# Altium PCB MAIN.PcbDoc
Units mm, origin at the board's own origin, x right, y up, seen from the top; angles counter-clockwise.
Board outline 80 x 22 mm, 2 copper layers (Top Layer, Bottom Layer), stack 1.571 mm thick; 27 components, 23 nets, 106 pads, 13 vias.
Unrouted connection lines stored in the file: 2.
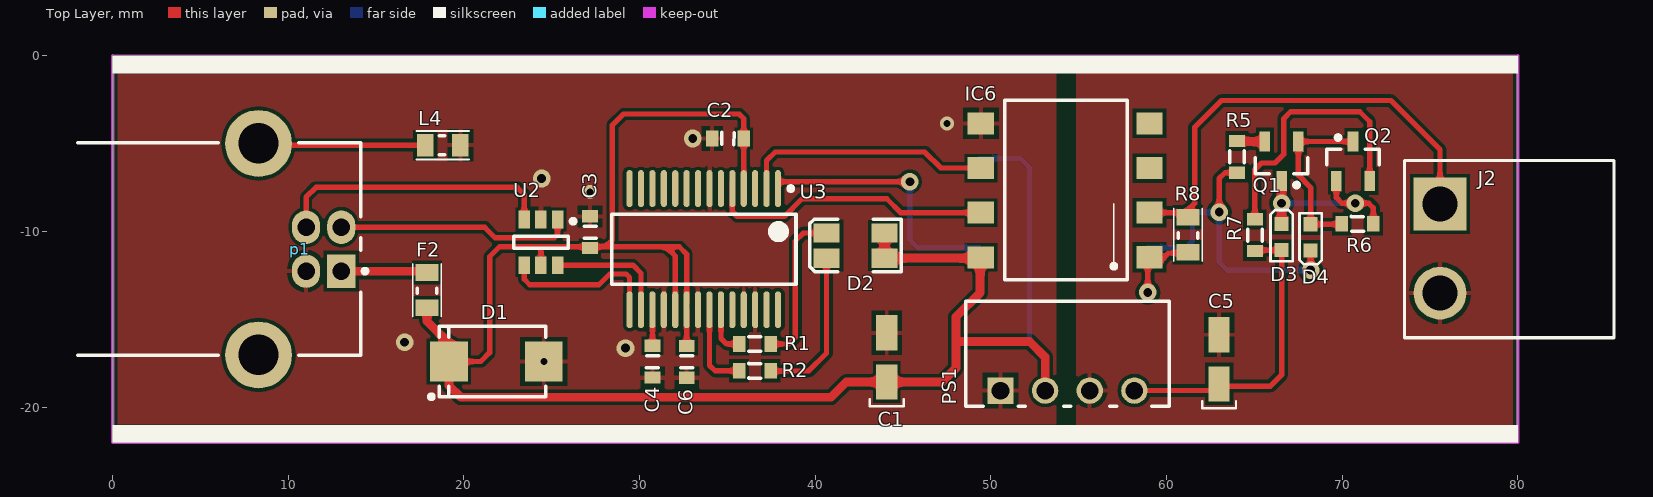
[diagram p0: Top Layer view]
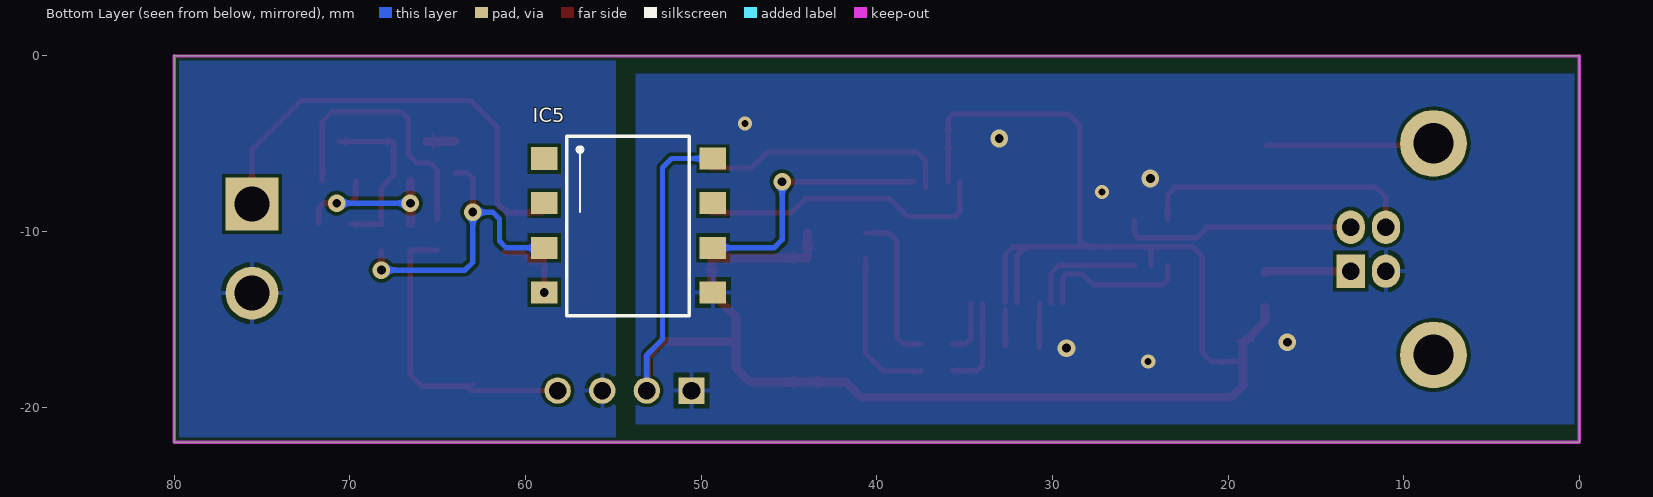
[diagram p1: Bottom Layer view, seen from below]

## Layer stack, top to bottom
Top Solder: solder mask 0.0102, Solder Resist, Dk 3.5
Top Layer: signal copper 0.0356
Dielectric 1: dielectric 1.5, FR-4, Dk 4.8
Bottom Layer: signal copper 0.0356
Bottom Solder: solder mask 0.0102, Solder Resist, Dk 3.5

## Board outline
0,-22 80,-22 80,0 0,0

## Design rules (kind name [scope] priority, off if disabled: settings)
Clearance [All] p1: gap=0.2 ignorepadtopadclearanceinfootprint=FALSE
PolygonConnect PolygonConnect_1 [(InNet('GND') OR InNet('GND1') OR InNet('GND2') OR InNet('GND3')) vs IsVia] p1: connectstyle=Direct reliefconductorwidth=0.254 reliefentries=4 polygonreliefangle="90 Angle" airgapwidth=0.254
PolygonConnect [All] p2: connectstyle=Relief reliefconductorwidth=0.254 reliefentries=4 polygonreliefangle="90 Angle" airgapwidth=0.254
RoutingVias [All] p1: holewidth=0.5 width=1 viastyle="Through Hole" minholewidth=0.5 minwidth=1 maxholewidth=5 maxwidth=1
SolderMaskExpansion [All] p1: expansion=0.102 istentingtop=FALSE
Width [All] p1: maxlimit=1 minlimit=0.2 preferedwidth=0.3
30 further rules are at their usual default settings.

## Classes and differential pairs
component class Main: C1 C5 C6 D3 D4 IC5 IC6 J2 PS1 Q1 Q2 R5 R6 R7 R8
component class USB: C2 C3 C4 D1 D2 F2 L4 p1 R1 R2 U2 U3

## Components (designator, comment, footprint, x,y, rotation, side; value= is the part's Value field where it differs from the comment)
C1 "10uF" CAP-TAN-A 44.069,-17.288 r270 top
C2 "100nF" c603 35.028,-4.699 r0 top
C3 "100nF" c603 27.178,-10.033 r270 top
C4 "100nF" c603 30.734,-17.399 r90 top
C5 "10uF" CAP-TAN-A 62.992,-17.399 r270 top
C6 "100nF" C603 32.678,-17.41 r90 top
D1 "SMBJ12A" DO-214AA 21.844,-17.399 r90 top
D2 "LED-RG" LED-1210 42.291,-10.795 r180 top
D3 "LED" LED-0603 66.548,-11.055 r90 top
D4 "LED" LED-0603 68.199,-9.579 r270 top
F2 "Fuse 1" PTC-0805 17.907,-13.335 r90 top
IC5 "HCPL-4100" SOP-8 54.128,-9.682 r180 bottom
IC6 "HCPL-4200" SOP-8 54.229,-7.62 r180 top
J2 "CONN-2" phonix-2 75.565,-13.502 r0 top
L4 "1K" r805 18.796,-5.08 r0 top
p1 "USB Connector" USB2-B-R -1.993,-11 r180 top
PS1 "B0524S-1WR2" B0524S1WR2 50.546,-19.05 r0 top
Q1 "BC846ALT1" SOT-23 66.548,-5.999 r270 top
Q2 "BC856ALT1" SOT-23 70.612,-5.999 r90 top
R1 "330" R0603 36.565,-16.399 r0 top
R2 "330" R0603 36.565,-17.923 r0 top
R5 "100" r0603 64.008,-5.745 r90 top
R6 "330K" r0603 70.866,-9.555 r180 top
R7 "100" r0603 65.024,-10.201 r270 top
R8 "470" R805 61.214,-10.176 r90 top
U2 "USBLC6-2" SOT-23-6 24.382,-10.608 r270 top
U3 "FT232RL" SSOP-28N 33.653,-11 r270 top

## Footprints (in the part's own frame and the unit in brackets; to place one, negate y for a bottom-side part, rotate by r counter-clockwise, add the part's x,y. Pads: shape width x height; smd on the part's side, far side on the other; paste and mask are expansions set on the pad)
B0524S1WR2 [mm]
  rect 1.5x1.5 hole 1: 1(0,0)
  round 1.5 hole 1: 2(2.54,0) 3(5.08,0) 4(7.62,0)
  silkscreen extent -1.99,-0.9 9.61,5.1, body extent -1.99,-0.9 9.61,5.1, height 10.26
c603 [mm]
  rect 0.7x0.9 smd: 1(-0.9,0) 2(0.9,0)
  silkscreen extent -0.35,-0.34 0.35,0.34, body extent -0.76,-0.38 0.76,0.38, height 0.6
C603 [mm]
  rect 0.7x0.9 smd: 1(-0.9,0) 2(0.9,0)
  silkscreen extent -0.35,-0.34 0.35,0.34, body extent -0.76,-0.38 0.76,0.38, height 0.6
CAP-TAN-A [mm] "Chip Capacitor, 2-Leads, Body 3.2x1.6mm, IPC High Density, chip Tantalum"
  rect 1.999x1.199 smd: 1(1.27,0) 2(-1.53,0)
  silkscreen extent 2.26,-0.97 2.65,0.97, body extent -1.94,-0.9 1.7,0.9, height 1.8
DO-214AA [mm]
  rect 2.26x2.16 smd: 1(0,-2.7) 2(0,2.7)
  silkscreen extent -2.12,-2.8 2,3.82, body extent -1.8,-2.7 1.8,2.7, height 2.3
LED-0603 [mm]
  rect 0.8x0.8 smd: 1(0,0) 2(1.5,0)
  silkscreen extent -0.64,-0.64 2.29,0.64, body extent -0.04,-0.41 1.56,0.38, height 0.7
LED-1210 [mm]
  rect 1.5x1.1 smd: 1(-1.651,0.713) 2(-1.651,-0.713) 3(1.651,-0.713) 4(1.651,0.713)
  silkscreen extent -2.6,-1.5 2.62,1.5, body extent -1.62,-1.36 1.62,1.34, height 1.1
phonix-2 [mm]
  rect 3x3 hole 2: 1(0,5.08)
  round 3 hole 2: 2(0,0)
  silkscreen extent -2.03,-2.54 9.91,7.54, body extent -2.1,-2.5 19.9,7.5, height 15.3
PTC-0805 [mm]
  rect 0.95x1.3 smd: 1(1.008,0.009) 2(-0.992,0.009)
  silkscreen extent -1.49,-0.8 1.51,0.82, body extent -1.07,-0.67 1.07,0.67, height 0.66
R0603 [mm]
  rect 0.7x0.9 smd: 1(-0.9,0) 2(0.9,0)
  silkscreen extent -0.34,-0.42 0.34,0.42, body extent -0.76,-0.38 0.76,0.38, height 0.45
r0603 [mm]
  rect 0.7x0.9 smd: 1(-0.9,0) 2(0.9,0)
  silkscreen extent -0.34,-0.42 0.34,0.42, body extent -0.76,-0.38 0.76,0.38, height 0.45
r805 [mm]
  rect 0.95x1.3 smd: 1(1,0) 2(-1,0)
  silkscreen extent -1.5,-0.81 1.5,0.81, body extent -1,-0.61 1,0.64, height 0.78
R805 [mm]
  rect 0.95x1.3 smd: 1(1,0) 2(-1,0)
  silkscreen extent -1.5,-0.81 1.5,0.81, body extent -1,-0.61 1,0.64, height 0.78
SOP-8 [mm]
  rect 1.5x1.3 smd: 1(-4.8,3.84)
  rect 1.5x1.25 smd: 2(-4.8,1.3) 3(-4.8,-1.24) 4(-4.8,-3.78) 5(4.8,-3.78) 6(4.8,-1.24) 7(4.8,1.3) 8(4.8,3.84)
  silkscreen extent -3.53,-5.1 3.45,5.11, body extent -4.97,-4.8 5.03,4.86, height 3.85
SOT-23 [mm]
  rect 1.15x0.6 smd: 1(-1.125,0.95) 2(-1.125,-0.95) 3(1.125,0)
  silkscreen extent -0.2,-1.5 1.47,1.5, body extent -1.13,-1.5 1.13,1.5, height 1.2
SOT-23-6 [mm]
  rect 1x0.65 smd: 1(-1.3,0.95) 2(-1.3,0) 3(-1.3,-0.95) 4(1.3,-0.95) 5(1.3,0) 6(1.3,0.95)
  silkscreen extent -1.32,-1.55 0.35,1.95, body extent -1.4,-1.45 1.4,1.45, height 1.45
SSOP-28N [mm]
  oval 2.1x0.35 smd: 1(-3.45,4.225) 2(-3.45,3.575) 3(-3.45,2.925) 4(-3.45,2.275) 5(-3.45,1.625) 6(-3.45,0.975) 7(-3.45,0.325) 8(-3.45,-0.325) 9(-3.45,-0.975) 10(-3.45,-1.625) 11(-3.45,-2.275) 12(-3.45,-2.925) 13(-3.45,-3.575) 14(-3.45,-4.225) 15(3.45,-4.225) 16(3.45,-3.575) 17(3.45,-2.925) 18(3.45,-2.275) 19(3.45,-1.625) 20(3.45,-0.975) 21(3.45,-0.325) 22(3.45,0.325) 23(3.45,0.975) 24(3.45,1.625) 25(3.45,2.275) 26(3.45,2.925) 27(3.45,3.575) 28(3.45,4.225)
  silkscreen extent -3.57,-5.25 2,5.25, body extent -3.73,-5.17 4.02,5.16, height 2.15
USB2-B-R [mm] "Connector; USB1.1, Type B, Thru-Hole; 4 Position; Right Angle"
  rect 1.6x1.9 hole 1: 1(-15.01,1.25)
  oval 1.6x1.9 hole 1: 2(-15.01,-1.25) 3(-13.01,-1.25) 4(-13.01,1.25)
  round 3.8 hole 2.3: 5(-10.3,6.02) 6(-10.3,-6.02)
  silkscreen extent -16.49,-6.05 -0.02,6.05, body extent -16.51,-7.45 -0.01,7.45, height 10.95

## Part data
C1 C5: library part CAP-POL, "Polar Capacitor", Voltage=10V
C2 C3 C4 C6: library part Cap, "Capacitor", Designer="Parsa Malekpour"
D1: library part SMBJxxA, "Surface Mount Transient Voltage Suppressors Diode"
D2: library part LED-RG-4
F2: "Fuse", LatestRevisionDate=17-Jul-2002, LatestRevisionNote="Re-released for DXP Platform.", PackageDescription="Thru-Hole; 2 Leads", PackageReference=PIN-W2/E2.8, Published=8-Jun-2000, Publisher="Altium Limited"
IC5: "<b>Isolation Amplifer</b><p> Source: http://www.avagotech.com/docs/AV02-0410EN", Package=None, Availability=Unavailable, MF="{'manufacturer': u'Broadcom Limited'}", MP=HCPL-4100, Price=None
IC6: "Optically Coupled 20 mA Current Loop Receiver", Package=None, Availability=Unavailable, MF="{'manufacturer': u'Broadcom Limited'}", MP=HCPL-4100, Price=None
L4: library part "Ferrite Bead", "FERRITE BEAD", Code_IEC=1005, Code_JEITA=0402, LatestRevisionDate=29-May-2009, LatestRevisionNote="IPC-7351 Footprint Added.", PackageDescription="Chip Inductor", Published=8-Jun-2000, Publisher="Altium Limited"
p1: library part USB2-B, "USB Connector-B Type", Adding Date=10/26/2010, Company="DASE Co", Designer="Eng. Saeid Jorablo"
PS1: "Power Supply", Manufacturer_Name="Mornsun Power", Datasheet Link=https://www.mornsun-power.com/public/uploads/pdf/B_D-1WR2.pdf, Height=10.16mm, Manufacturer_Part_Number=B0524S-1WR2
Q1: "General Purpose Transistor NPN Silicon", ComponentLink1Description="Manufacturer Link", ComponentLink1URL=http://www.onsemi.com/site/products/landing?taxonomyID=194, ComponentLink2Description=Datasheet, ComponentLink2URL=http://www.onsemi.com/pub/Collateral/BC846ALT1-D.PDF, DatasheetVersion=1997, LatestRevisionDate=17-Jul-2002, LatestRevisionNote="Re-released for DXP Platform.", PackageDescription="SOT-23; 3 Leads; Body 3.0 x 2.6 mm, inc. leads (LxW max)", PackageReference=318-08, PackageVersion=1997, Published=29-Sep-2000, Publisher="Altium Limited"
Q2: "General Purpose Transistor PNP Silicon", ComponentLink1Description="Manufacturer Link", ComponentLink1URL=http://www.onsemi.com/site/products/landing?taxonomyID=194, ComponentLink2Description=Datasheet, ComponentLink2URL=http://www.onsemi.com/pub/Collateral/BC856ALT1-D.PDF, DatasheetVersion=1997, LatestRevisionDate=17-Jul-2002, LatestRevisionNote="Re-released for DXP Platform.", PackageDescription="SOT-23; 3 Leads; Body 3.0 x 2.6 mm, inc. leads (LxW max)", PackageReference=318-08, PackageVersion=1997, Published=29-Sep-2000, Publisher="Altium Limited"
R1 R2 R5 R6 R7 R8: library part Resistor, "Resistor", Designer="Parsa Malekpour"
U2: "Very low capacitance ESD protection"

## Via types
v1: diameter 1, hole 0.5, Top Layer to Bottom Layer, tented both sides, 9 vias
v2: diameter 0.8, hole 0.4, Top Layer to Bottom Layer, tented both sides, 3 vias
v3: diameter 1, hole 0.5, Top Layer to Bottom Layer, 1 vias

## Nets (pads, with @x,y where several pads share a name; then routed paths per layer and width w, separated by ;. In a path a pad name is that pad's centre, name@x,y a point inside that pad or via, vN(x,y) a via of type N, cw(c..) or ccw(c..) an arc to the next point about the centre after c; other vN are vias at no path point)
+24V: C5.1 D3.1 PS1.4 R7.2 | length 17.7
  Top Layer w0.3: PS1.4@58.293,-19.05 63.119,-19.05 C5.1@63.373,-18.796 ; C5.1 63.119,-18.796 C5.1@63.373,-18.796 ; R7.2@65.024,-11.055 D3.1 66.548,-15.621 66.548,-18.161 65.913,-18.796 C5.1@63.373,-18.796
GND: C1.2 C2.1 C3.1 C4.1 C6.1 D1.1 IC5.5 IC6.5 L4.1 p1.4 PS1.1 U2.2 U3.7 U3.18 U3.21 U3.25 U3.26
  other v1: 29.195,-16.628 24.42,-6.976 33.02,-4.699
  other v2: 24.544,-17.399 27.178,-7.747 47.498,-3.84
  other v3: 16.622,-16.292
GND1: C5.2 J2.2 PS1.3
NetC4_2: C4.2 U3.17 | length 2.5
  Top Layer w0.3: U3.17@30.728,-14.058 U3.17 30.728,-16.557 C4.2@30.748,-16.577
NetD2_3: D2.3 R1.2 | length 9
  Top Layer w0.3: R1.2 38.487,-16.399 38.862,-16.024 38.862,-10.541 39.321,-10.082 D2.3
NetD2_4: D2.4 R2.2 | length 9
  Top Layer w0.3: R2.2 37.481,-17.94 39.624,-17.94 40.64,-16.924 D2.4
NetD3_2: D3.2 Q1.3 Q2.1 R6.1 | length 10.8
  Top Layer w0.3: Q2.1 69.662,-8.067 69.977,-8.382 v1(70.739,-8.382) 71.501,-8.382 71.766,-8.647 R6.1
  Top Layer w0.5: D3.2 v1(66.548,-8.382) Q1.3
  Bottom Layer w0.3: v1(66.548,-8.382) v1(70.739,-8.382)
NetD4_1: D4.1 Q1.1 Q2.3 R6.2 | length 9.9
  Top Layer w0.3: R6.2 69.942,-9.579 D4.1 68.199,-7.484 67.498,-6.783 Q1.1 Q2.3
NetD4_2: D4.2 IC5.3 R5.1 | length 18.1
  Top Layer w0.3: v1(62.992,-8.89) 62.992,-6.985 63.332,-6.645 R5.1 ; v1(68.199,-12.192) D4.2
  Bottom Layer w0.3: IC5.3 61.087,-10.922 61.468,-10.541 61.468,-9.277 61.849,-8.896 62.986,-8.896 v1(62.992,-8.89) 62.992,-11.742 63.442,-12.192 v1(68.199,-12.192)
NetF2_1: F2.1 p1.1 | length 4.9
  Top Layer w0.5: p1.1 17.821,-12.25 F2.1
NetIC5_4: IC5.4 IC6.1 R8.2 | length 4.6
  Top Layer w0.3: v1(58.928,-13.462) 58.928,-11.561 IC6.1 59.276,-11.707 59.629,-11.707 60.124,-11.213 61.177,-11.213 R8.2
NetIC5_6: IC5.6 U3.1 | length 14.9
  Top Layer w0.3: U3.1@37.878,-7.158 v1(45.385,-7.158)
  Bottom Layer w0.3: v1(45.385,-7.158) 45.385,-10.46 45.847,-10.922 IC5.6
NetIC6_2: IC6.2 J2.1 R8.1 | length 26
  Top Layer w0.3: IC6.2 61.057,-8.92 61.595,-8.382 61.595,-4.064 63.119,-2.54 72.771,-2.54 75.565,-5.334 J2.1
NetIC6_6: IC6.6 U3.2 | length 14.4
  Top Layer w0.3: U3.2 37.228,-5.952 37.719,-5.461 46.228,-5.461 47.147,-6.38 IC6.6
NetIC6_7: IC6.7 U3.5 | length 16.7
  Top Layer w0.3: U3.5@35.278,-7.158 U3.5 35.278,-8.862 35.549,-9.133 38.238,-9.133 39.243,-8.128 44.069,-8.128 44.861,-8.92 IC6.7
NetL4_2: L4.2 p1.5 p1.6 | length 8.1
  Top Layer w0.3: p1.6@9.775,-4.98 9.875,-5.08 L4.2
Netp1_2: p1.2 U2.1 U2.6 U3.16 | length 20.1
  Top Layer w0.3: p1.2 21.18,-9.75 21.784,-10.354 25.144,-10.354 25.332,-10.166 U2.1 ; U2.6 29.619,-11.908 30.078,-12.367 U3.16@30.078,-14.058
Netp1_3: p1.3 U2.3 U2.4 U3.15 | length 24.7
  Top Layer w0.3: p1.3 11.017,-8.033 11.572,-7.478 23.03,-7.478 23.432,-7.88 U2.3 ; U2.4 23.432,-12.706 23.747,-13.021 27.684,-13.021 28.297,-12.408 29.23,-12.408 29.334,-12.512 29.428,-12.606 U3.15@29.428,-14.058
NetQ1_2: Q1.2 R5.2 | length 1.6
  Top Layer w0.5: R5.2 64.037,-4.874 Q1.2
NetQ2_2: Q2.2 R7.1 | length 15.5
  Top Layer w0.3: R7.1 65.024,-6.477 65.405,-6.096 66.167,-6.096 66.675,-5.588 66.675,-3.556 67.056,-3.175 70.993,-3.175 71.562,-3.744 Q2.2
NetR1_1: R1.1 U3.23 | length 3.2
  Top Layer w0.3: U3.23@34.628,-14.058 U3.23 34.628,-16.084 34.943,-16.399 R1.1
NetR2_1: R2.1 U3.22 | length 5.4
  Top Layer w0.3: U3.22@33.978,-14.058 U3.22 33.978,-17.611 34.29,-17.923 R2.1
VUSB: C1.1 C2.2 C3.2 C6.2 D1.2 D2.1 D2.2 F2.2 IC5.8 IC6.8 PS1.2 U2.5 U3.4 U3.19 U3.20 | length 119.5
  Top Layer w0.3: D1.2 20.955,-17.399 21.463,-16.891 21.463,-11.43 22.031,-10.862 24.206,-10.862 ; U2.5 24.382,-11.038 24.206,-10.862 ; U3.19@32.028,-14.058 32.028,-11.396 31.494,-10.862 ; C6.2 U3.20 ; U3.20@32.678,-14.058 32.678,-11.284 32.256,-10.862 31.494,-10.862 ; U3.4@35.928,-7.158 C2.2 35.928,-3.565 35.665,-3.302 29.083,-3.302 28.448,-3.937 28.448,-10.481 28.067,-10.862 ; 24.206,-10.862 28.067,-10.862 ; 28.067,-10.862 31.494,-10.862
  Top Layer w0.5: F2.2 17.898,-15.104 19.144,-16.35 D1.2 19.144,-18.763 19.812,-19.431 40.894,-19.431 41.767,-18.558 C1.1 47.228,-18.558 48.006,-17.78 48.006,-16.256 ; D2.2 D2.1 49.381,-11.508 49.381,-13.484 48.006,-14.859 48.006,-16.256 ; PS1.2 53.086,-17.145 52.197,-16.256 48.006,-16.256
  Bottom Layer w0.3: IC5.8 51.689,-5.842 52.197,-6.35 52.197,-16.129 53.086,-17.018 PS1.2
pads on no net: IC5.1 IC5.2 IC5.7 IC6.3 IC6.4 U3.3 U3.6 U3.8 U3.9 U3.10 U3.11 U3.12 U3.13 U3.14 U3.24 U3.27 U3.28

## Polygon pours and split planes (outlines as drawn)
GND1 on Top Layer "GND1_L01_P030" (solid, pour order 30): 80,0 54.864,0 54.864,-22 80,-22
GND on Top Layer "GND_L01_P017" (solid, pour order 17): 53.721,-1.016 0,-1.016 0,-20.955 53.721,-20.955
GND1 on Bottom Layer "GND1_L02_P032" (solid, pour order 32): 80,0 54.864,0 54.864,-22 80,-22
GND on Bottom Layer "GND_L02_P021" (solid, pour order 21): 53.721,-1.016 0,-1.016 0,-20.955 53.721,-20.955

## Keep-outs
Keep-Out Layer:
  the board outline again, w0.2

## Silkscreen, mask and mechanical layers (free items; w line width, h text height)
Top Overlay:
  rectangle: 0,-22 80,-21
  rectangle: 0,-1 80,0
Top Solder:
  rectangle: 53.721,-21.971 54.864,-0.021

## Text inside footprints (layer, text, board x,y; h text height)
p1: Mechanical 1 "PCB Edge" at -1.668,-5.349 h0.25 r270